# EAGLE board FAJAS (original) (EAGLE 9.6.2)
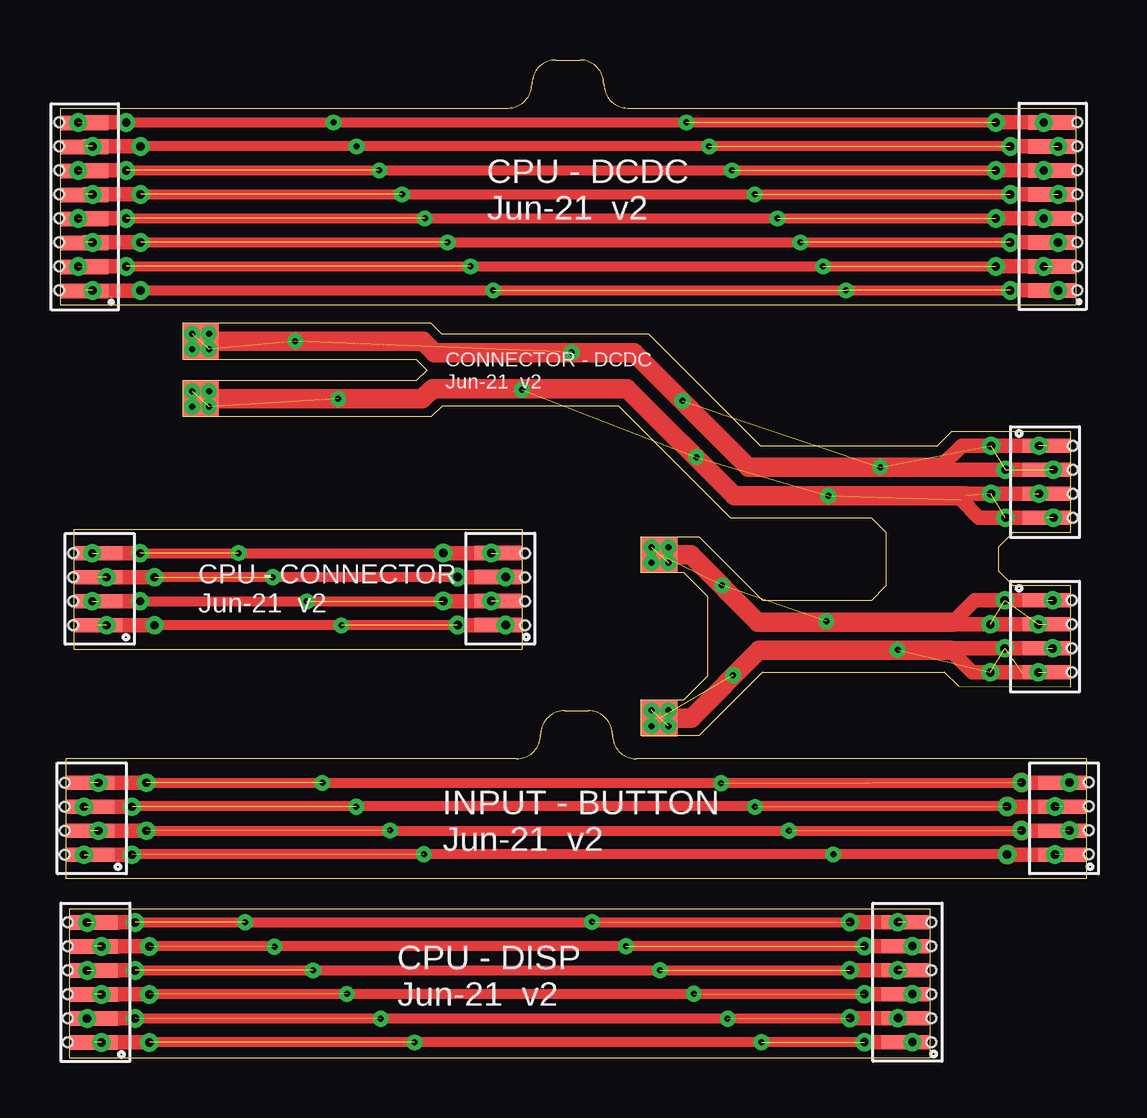
[diagram p0: board, top side]
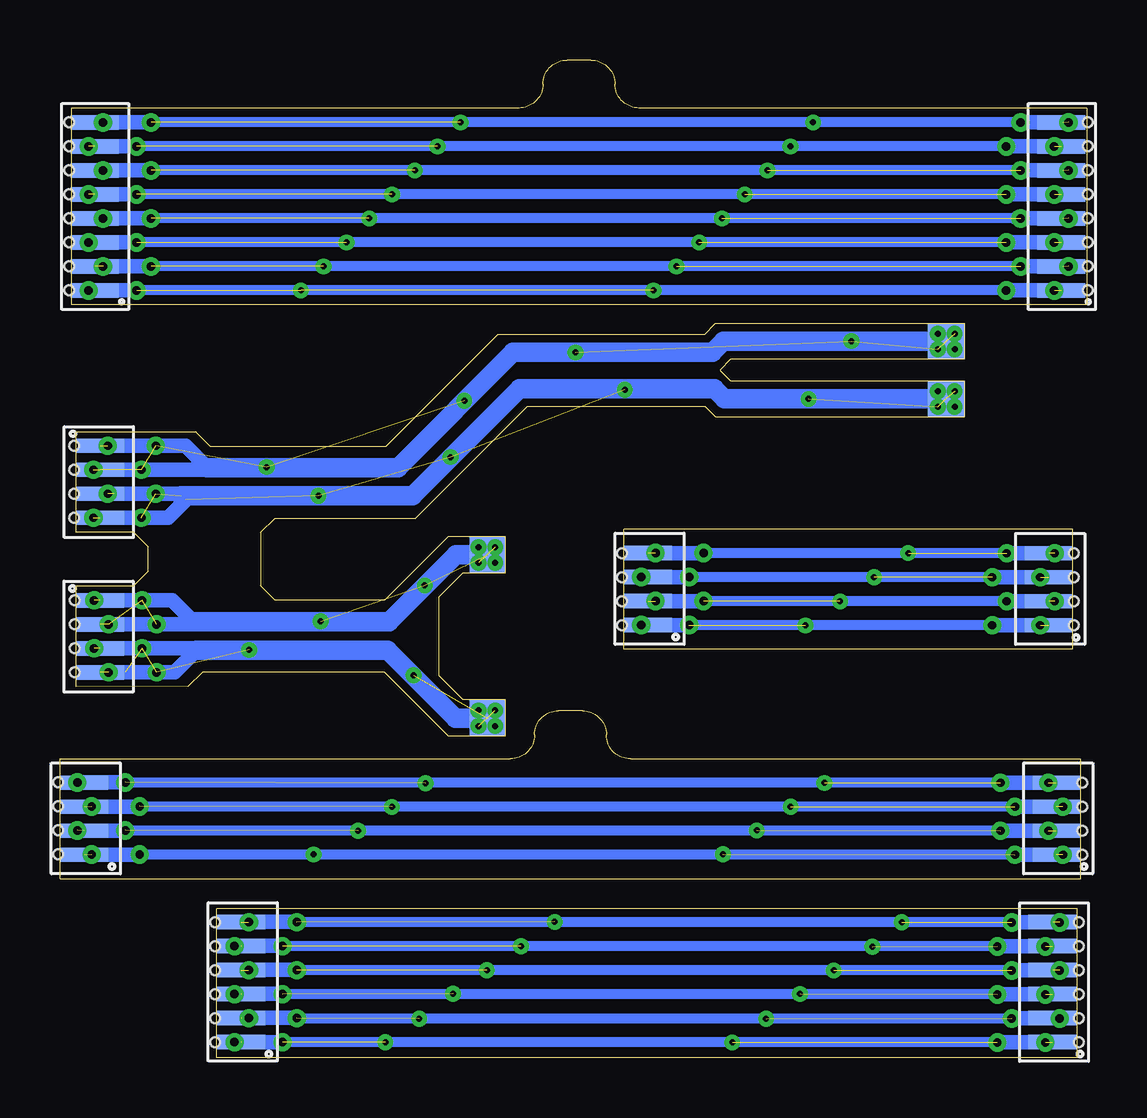
[diagram p1: board, bottom side, seen from below]

Size 42.81 x 41.57 mm. Coordinates in mm from the lower left corner, seen from the top.
Outline: 29.07,19.27 29.28,19.06
Outline: 29.28,19.06 33.83,19.06 34.43,19.66 34.43,21.89 33.83,22.49 27.97,22.49 23.31,27.15 15.92,27.15 15.47,26.7 5.12,26.7 5.12,28.2 14.85,28.2 15.3,28.65 14.85,29.1 5.12,29.1 5.12,30.6 15.47,30.6 15.92,30.15 24.55,30.15 29.07,25.63 29.21,25.49 36.55,25.49 37.15,26.09 42.13,26.09 42.13,21.89 39.73,21.89 39.13,21.29 39.13,20.26 39.73,19.66 42.13,19.66 42.13,15.46 37.46,15.47 36.86,16.07 29.28,16.06 29.07,15.85 26.63,13.41 24.22,13.41 24.22,14.91 26.01,14.91 27.01,15.91 27.01,19.21 26.01,20.21 24.22,20.21 24.22,21.71 26.63,21.71 29.07,19.27
Outline: 29.28,19.06 29.27,19.06 29.07,19.27
Outline: 42.81,7.45 42.81,12.45 24.03,12.45 arc-90 23.03,13.45 arc90 22.03,14.45 21.03,14.45 arc90 20.03,13.45 arc-90 19.03,12.45 0.25,12.45 0.25,7.45 42.81,7.45
Outline: 0.59,17.01 0.59,22.01 19.29,22.01 19.29,17.01 0.59,17.01
Outline: 0,31.37 42.34,31.37 42.34,39.57 23.67,39.57 arc-90 22.67,40.57 arc90 21.67,41.57 20.67,41.57 arc90 19.67,40.57 arc-90 18.67,39.57 0,39.57 0,31.37
Outline: 0.41,6.2 36.27,6.2 36.27,0 0.41,0 0.41,6.2
Copper layers (1*16): Top 0.035mm / dielectric 1.5mm / Bottom 0.035mm
Design rules "default *": minimum track width 6mil, minimum drill 0.35mm, track to track 6mil, track to pad 6mil, pad to pad 6mil, via to via 6mil, smd to smd 6mil, copper to edge 0mil, drill to drill 6mil, minimum pad ring 10mil, minimum via ring 8mil, stop-mask expansion 4mil, vias tented up to drill 50mil, thermal gap 10mil
Net classes: 1 power: width 0.178 mm; 2 gnd: width 0.305 mm, drill 0.483 mm, clearance 0.203 mm
Holes 0.4 mm at 0.54,21.02 0.54,20.02 0.54,19.02 0.54,18.02 -0.04,38.97 -0.04,37.97 -0.04,36.97 -0.04,35.97 -0.04,34.97 -0.04,33.97 -0.04,32.97 -0.04,31.97 42.41,35.97 42.41,36.97 42.41,37.97 42.41,38.97 42.41,31.97 42.41,32.97 42.41,33.97 42.41,34.97 42.18,19.06 42.18,18.06 42.18,17.06 42.18,16.06 42.21,22.5 42.21,23.5 42.21,24.5 42.21,25.5 42.88,11.47 42.88,10.47 42.88,9.47 42.88,8.47 0.2,8.46 0.2,9.46 0.2,10.46 0.2,11.46 0.33,5.64 0.33,4.64 0.33,3.64 0.33,2.64 0.33,1.64 0.33,0.64 36.33,0.65 36.33,1.65 36.33,2.65 36.33,3.65 36.33,4.65 36.33,5.65 19.38,18.03 19.38,19.03 19.38,20.03 19.38,21.03

## Footprints (pad centres in the part's own frame; a part is rotated, then mirrored left to right if it is on the bottom)
FLEX6 = smd 0.6 x 2: 1 -2.5,0.25; 2 -1.5,0.25; 3 -0.5,0.25; 4 0.5,0.25; 5 1.5,0.25; 6 2.5,0.25
FLEX4 = smd 0.6 x 2: 1 -3.77,1.52; 2 -2.77,1.52; 3 -1.77,1.52; 4 -0.77,1.52
TESTPAD_TP15SQ = smd 1.5 x 1.5: TP 0,0
FLEX8 = smd 0.6 x 2: 1 -3.5,0.25; 2 -2.5,0.25; 3 -1.5,0.25; 4 -0.5,0.25; 5 0.5,0.25; 6 1.5,0.25; 7 2.5,0.25; 8 3.5,0.25

## Placement (x,y rotation side)
DISP_CPU_1  DISP_CPU_1  [FLEX6]  35.51,3.15 90 top
DISP_CPU_2  DISP_CPU_2  [FLEX6]  1.67,3.14 90 top
DISP_CPU_3  DISP_CPU_2  [FLEX6]  1.18,3.15 90 bottom
DISP_CPU_4  DISP_CPU_1  [FLEX6]  35,3.16 90 bottom
FLX1  FLEX4  [FLEX4]  43.31,12.23 90 top
FLX2  FLEX4  [FLEX4]  42.64,21.73 270 bottom
FLX3  FLEX4  [FLEX4]  19.81,21.8 90 top
FLX4  FLEX4  [FLEX4]  39.61,21.73 270 top
FLX5  FLEX4  [FLEX4]  39.61,15.29 270 top
FLX6  FLEX4  [FLEX4]  2.79,12.23 90 top
FLX7  FLEX4  [FLEX4]  42.65,15.29 270 bottom
FLX8  FLEX4  [FLEX4]  40.27,12.23 90 bottom
FLX9  FLEX4  [FLEX4]  -0.26,12.23 90 bottom
FLX10  FLEX4  [FLEX4]  0.07,21.79 90 bottom
FLX11  FLEX4  [FLEX4]  16.77,21.8 90 bottom
GND1  TESTPAD_TPSQTP15SQ  [TESTPAD_TP15SQ]  24.98,20.96 0 bottom
GND2  TESTPAD_TPSQTP15SQ  [TESTPAD_TP15SQ]  24.98,20.95 0 top
K1  FLEX_DCDC  [FLEX8]  0.81,35.47 90 bottom
K2  FLEX_DCDC  [FLEX8]  1.26,35.45 90 top
K3  FLEX_CONN  [FLEX4]  3.11,21.79 90 top
K4  FLEX8  [FLEX8]  41.61,35.47 90 top
K5  FLEX8  [FLEX8]  41.11,35.47 90 bottom
VO+  TESTPAD_TPSQTP15SQ  [TESTPAD_TP15SQ]  5.87,29.84 0 top
VO+1  TESTPAD_TPSQTP15SQ  [TESTPAD_TP15SQ]  5.87,29.85 0 bottom
VO-  TESTPAD_TPSQTP15SQ  [TESTPAD_TP15SQ]  5.87,27.45 0 top
VO-1  TESTPAD_TPSQTP15SQ  [TESTPAD_TP15SQ]  5.87,27.45 0 bottom
VSYS_IP  TESTPAD_TPSQTP15SQ  [TESTPAD_TP15SQ]  24.98,14.15 0 top
VSYS_IP1  TESTPAD_TPSQTP15SQ  [TESTPAD_TP15SQ]  24.98,14.15 0 bottom

## Library data of the parts
DISP_CPU_1-DISP_CPU_4 K1 K2 K4 K5 = Flex_Faja_connector
FLX1-FLX11 K3 = Flex4
GND1 GND2 VO+ VO+1 VO- VO-1 VSYS_IP VSYS_IP1 = BeagleBone_Blue_R3

## Nets
BUTTON-INPUT_1: FLX1.1 FLX6.1 FLX8.1 FLX9.1
BUTTON-INPUT_2: FLX1.2 FLX6.2 FLX8.2 FLX9.2
BUTTON-INPUT_3: FLX1.3 FLX6.3 FLX8.3 FLX9.3
BUTTON-INPUT_4: FLX1.4 FLX6.4 FLX8.4 FLX9.4
CPU-CONN_1: FLX3.1 FLX10.1 FLX11.1 K3.1
CPU-CONN_2: FLX3.2 FLX10.2 FLX11.2 K3.2
CPU-CONN_3: FLX3.3 FLX10.3 FLX11.3 K3.3
CPU-CONN_4: FLX3.4 FLX10.4 FLX11.4 K3.4
CPU-DCDC_1: K1.1 K2.1 K4.1 K5.1
CPU-DCDC_2: K1.2 K2.2 K4.2 K5.2
CPU-DCDC_3: K1.3 K2.3 K4.3 K5.3
CPU-DCDC_4: K1.4 K2.4 K4.4 K5.4
CPU-DCDC_5: K1.5 K2.5 K4.5 K5.5
CPU-DCDC_6: K1.6 K2.6 K4.6 K5.6
CPU-DCDC_7: K1.7 K2.7 K4.7 K5.7
CPU-DCDC_8: K1.8 K2.8 K4.8 K5.8
DSP-CPU_1: DISP_CPU_1.1 DISP_CPU_2.1 DISP_CPU_3.1 DISP_CPU_4.1
DSP-CPU_2: DISP_CPU_1.2 DISP_CPU_2.2 DISP_CPU_3.2 DISP_CPU_4.2
DSP-CPU_3: DISP_CPU_1.3 DISP_CPU_2.3 DISP_CPU_3.3 DISP_CPU_4.3
DSP-CPU_4: DISP_CPU_1.4 DISP_CPU_2.4 DISP_CPU_3.4 DISP_CPU_4.4
DSP-CPU_5: DISP_CPU_1.5 DISP_CPU_2.5 DISP_CPU_3.5 DISP_CPU_4.5
DSP-CPU_6: DISP_CPU_1.6 DISP_CPU_2.6 DISP_CPU_3.6 DISP_CPU_4.6
GND: FLX5.1 FLX5.2 FLX7.1 FLX7.2 GND1.TP GND2.TP
VOUT+: FLX2.1 FLX2.2 FLX4.1 FLX4.2 VO+1.TP VO+.TP
VOUT-: FLX2.3 FLX2.4 FLX4.3 FLX4.4 VO-1.TP VO-.TP
VSYS: FLX5.3 FLX5.4 FLX7.3 FLX7.4 VSYS_IP1.TP VSYS_IP.TP

## Tracks (layer width: path | path; a pad name or v marks a point on that pad's centre or on a via)
BUTTON-INPUT_1  (via drill 0.25, 0.35)  (3 unrouted)
  Top 0.406: v39.48,8.47 v32.23,8.47 v3.01,8.47 v3,8.46
  Top 0.61: FLX8.1 39.49,8.46 | FLX9.1 v3,8.46
  Top 0.813: 39.49,8.46 v39.48,8.47
  Bottom 0.406: v39.48,8.47 v32.23,8.47 v3.01,8.47 v3,8.46
  Bottom 0.61: FLX9.1 v3,8.46 | FLX8.1 v39.49,8.46 v39.48,8.47
  other vias: 41.48,8.47 1,8.46 15.17,8.48
BUTTON-INPUT_2  (via drill 0.25, 0.35)  (4 unrouted)
  Top 0.406: v3.6,9.46 v40.09,9.46 40.09,9.46
  Top 0.61: FLX8.2 40.09,9.46 | FLX9.2 v3.6,9.46
  Top 0.813: 40.09,9.46 v40.08,9.47
  Bottom 0.406: v3.6,9.46 v40.09,9.46
  Bottom 0.61: FLX9.2 v3.6,9.46 | FLX8.2 v40.09,9.46 v40.08,9.47
  other vias: 30.38,9.46 42.08,9.47 1.6,9.46 13.76,9.47
BUTTON-INPUT_3  (via drill 0.25, 0.35)  (4 unrouted)
  Top 0.406: v39.48,10.47 v3.01,10.47 v3,10.46
  Top 0.61: FLX8.3 39.49,10.46 | FLX9.3 v3,10.46
  Top 0.813: 39.49,10.46 v39.48,10.47
  Bottom 0.406: v39.48,10.47 v3.01,10.47 v3,10.46
  Bottom 0.61: FLX9.3 v3,10.46 | FLX8.3 v39.49,10.46 v39.48,10.47
  other vias: 41.48,10.47 1,10.46 28.97,10.45 12.35,10.46
BUTTON-INPUT_4  (via drill 0.25, 0.35)  (4 unrouted)
  Top 0.406: v3.6,11.46 v40.09,11.46 40.09,11.46
  Top 0.61: FLX8.4 40.09,11.46 | FLX9.4 v3.6,11.46
  Top 0.813: 40.09,11.46 v40.08,11.47
  Bottom 0.406: v3.6,11.46 v40.07,11.46 v40.08,11.47
  Bottom 0.61: FLX9.4 v3.6,11.46 | v40.08,11.47 v42.08,11.47
  other vias: 1.6,11.46 10.94,11.45 27.56,11.44
CPU-CONN_1  (via drill 0.25, 0.35)  (3 unrouted)
  Top 0.406: v16.58,18.03 3.95,18.03 v3.94,18.02
  Top 0.508: FLX10.1
  Top 0.61: FLX10.1 v3.94,18.02 | FLX11.1 v16.58,18.03
  Bottom 0.406: 3.98,18.02 FLX11.1
  Bottom 0.61: FLX10.1 3.98,18.02 | v16.58,18.03 v18.58,18.03
  other vias: 1.94,18.02 11.73,18.01
CPU-CONN_2  (via drill 0.25, 0.35)  (3 unrouted)
  Top 0.406: v3.34,19.02 15.97,19.02 v15.98,19.03
  Top 0.61: FLX10.2 v3.34,19.02 | FLX11.2 v15.98,19.03
  Bottom 0.406: 3.38,19.02 18.01,19.02 FLX11.2
  Bottom 0.61: FLX10.2 3.38,19.02 | v15.98,19.03 18,19.03 18.01,19.02
  other vias: 17.98,19.03 1.34,19.02 10.29,19.01
CPU-CONN_3  (via drill 0.25, 0.35)  (3 unrouted)
  Top 0.406: v16.58,20.03 3.95,20.03 v3.94,20.02
  Top 0.508: FLX10.3
  Top 0.61: FLX10.3 v3.94,20.02 | FLX11.3 v16.58,20.03
  Bottom 0.406: 4.06,20.02 FLX11.3
  Bottom 0.61: FLX10.3 4.06,20.02 | v16.58,20.03 v18.58,20.03
  other vias: 1.94,20.02 8.87,20.02
CPU-CONN_4  (via drill 0.25, 0.35)  (4 unrouted)
  Top 0.406: v3.34,21.02 15.97,21.02 v15.98,21.03
  Top 0.61: FLX10.4 v3.34,21.02 | v15.98,21.03 v17.98,21.03
  Bottom 0.406: v3.34,21.02 17.95,21.02 18.92,21.02 18.98,21.08
  Bottom 0.61: FLX10.4 v3.34,21.02 | v15.98,21.03 17.94,21.03 17.95,21.02
  other vias: 1.34,21.02 7.45,21.03
CPU-DCDC_1  (via drill 0.25, 0.35)  (3 unrouted)
  Top 0.406: 1.01,31.97 K2.1 | v3.36,31.97 v39.61,31.97
  Top 0.61: K2.1 3.36,31.95 v3.36,31.97 | v39.61,31.97 K5.1
  Bottom 0.406: K1.1 1.51,31.97 v39.61,31.97 v41.61,31.97
  Bottom 0.61: v3.36,31.97 1.51,31.97 | K5.1 v39.61,31.97
  other vias: 1.36,31.97 18.06,31.97 32.76,31.97
CPU-DCDC_2  (via drill 0.25, 0.35)  (5 unrouted)
  Top 0.406: 41.36,32.95 K5.2 | v2.76,32.97 39.46,32.97
  Top 0.61: K2.2 1.01,32.97 v2.76,32.97 | v39.01,32.97 39.46,32.97 v41.01,32.97
  Bottom 0.406: 2.81,32.97 v39.01,32.97
  Bottom 0.61: K1.2 2.81,32.97 | v39.01,32.97 v41.01,32.97
  other vias: 0.76,32.97 17.11,32.97 31.81,32.97
CPU-DCDC_3  (via drill 0.25, 0.35)  (3 unrouted)
  Top 0.406: 1.01,33.97 K2.3 | v3.36,33.97 v39.61,33.97
  Top 0.61: K2.3 1.01,33.97 v3.36,33.97 | v39.61,33.97 K5.3
  Bottom 0.406: K1.3 v39.61,33.97 v41.61,33.97
  Bottom 0.61: v3.36,33.97 K1.3 | K5.3 v39.61,33.97
  other vias: 1.36,33.97 16.16,33.97 30.86,33.97
CPU-DCDC_4  (via drill 0.25, 0.35)  (4 unrouted)
  Top 0.406: 41.36,34.95 K5.4 | v2.76,34.97 v39.01,34.97
  Top 0.61: K2.4 1.01,34.97 v2.76,34.97 | v39.01,34.97 v41.01,34.97
  Bottom 0.406: 2.91,34.97 v39.01,34.97 | 41.06,34.97 K5.4
  Bottom 0.61: K1.4 2.91,34.97 | v39.01,34.97 41.06,34.97
  other vias: 0.76,34.97 15.21,34.97 29.91,34.97
CPU-DCDC_5  (via drill 0.25, 0.35)  (4 unrouted)
  Top 0.406: 1.01,35.97 K2.5 | v3.36,35.97 v39.61,35.97
  Top 0.61: K2.5 1.01,35.97 v3.36,35.97 | v39.61,35.97 K5.5
  Bottom 0.406: K1.5 1.41,35.97 v39.61,35.97
  Bottom 0.61: v3.36,35.97 1.41,35.97 | K5.5 v39.61,35.97
  other vias: 1.36,35.97 41.61,35.97 14.26,35.97 28.96,35.97
CPU-DCDC_6  (via drill 0.25, 0.35)  (4 unrouted)
  Top 0.406: v2.76,36.97 39.36,36.97
  Top 0.61: K2.6 1.01,36.97 v2.76,36.97 | v39.01,36.97 39.36,36.97 v41.01,36.97
  Bottom 0.406: 2.81,36.97 v39.01,36.97 | 41.06,36.97 K5.6
  Bottom 0.61: K1.6 2.81,36.97 | v39.01,36.97 41.06,36.97
  other vias: 0.76,36.97 13.31,36.97 28.01,36.97
CPU-DCDC_7  (via drill 0.25, 0.35)  (3 unrouted)
  Top 0.406: 1.01,37.97 K2.7 | v3.36,37.97 v12.36,37.97 v39.61,37.97
  Top 0.61: K2.7 1.01,37.97 v3.36,37.97 | v39.61,37.97 K5.7
  Bottom 0.406: 3.46,37.97 v39.61,37.97
  Bottom 0.61: K1.7 3.46,37.97 | K5.7 v39.61,37.97
  other vias: 1.36,37.97 41.61,37.97 27.06,37.97
CPU-DCDC_8  (via drill 0.25, 0.35)  (3 unrouted)
  Top 0.406: 41.36,38.95 K5.8 | v2.76,38.97 v11.41,38.97 v39.01,38.97
  Top 0.61: K2.8 1.01,38.97 v2.76,38.97 | v39.01,38.97 v41.01,38.97
  Bottom 0.406: 2.81,38.97 v39.01,38.97 | 41.11,38.97 K5.8
  Bottom 0.61: K1.8 2.81,38.97 | v39.01,38.97 41.11,38.97
  other vias: 0.76,38.97 26.11,38.97
DSP-CPU_1  (via drill 0.25, 0.35)  (4 unrouted)
  Top 0.406: v33.53,0.65 3.75,0.65 v3.73,0.64
  Top 0.61: DISP_CPU_2.1 v3.73,0.64 | v33.53,0.65 v35.53,0.65
  Bottom 0.406: v3.73,0.64 33.52,0.64 v33.53,0.65
  Bottom 0.61: DISP_CPU_3.1 3.72,0.65 v3.73,0.64 | DISP_CPU_4.1 v33.53,0.65
  other vias: 1.73,0.64 14.78,0.64 29.24,0.65
DSP-CPU_2  (via drill 0.25, 0.35)  (3 unrouted)
  Top 0.406: v3.13,1.64 32.92,1.64 v32.93,1.65
  Top 0.61: DISP_CPU_2.2 v3.13,1.64 | v32.93,1.65 v34.93,1.65
  Bottom 0.406: v32.93,1.65 32.92,1.64 v1.13,1.64
  Bottom 0.61: DISP_CPU_3.2 3.12,1.65 v3.13,1.64 | DISP_CPU_4.2 v32.94,1.66 v32.93,1.65
  other vias: 27.83,1.63 13.37,1.62
DSP-CPU_3  (via drill 0.25, 0.35)  (4 unrouted)
  Top 0.406: v33.53,2.65 3.75,2.65 v3.73,2.64
  Top 0.61: DISP_CPU_2.3 v3.73,2.64 | v33.53,2.65 v35.53,2.65
  Bottom 0.406: v3.73,2.64 33.52,2.64 v33.54,2.66
  Bottom 0.61: DISP_CPU_3.3 3.72,2.65 v3.73,2.64 | DISP_CPU_4.3 v33.54,2.66 v33.53,2.65
  other vias: 1.73,2.64 11.96,2.66 26.42,2.67
DSP-CPU_4  (via drill 0.25, 0.35)  (4 unrouted)
  Top 0.406: v3.13,3.64 32.92,3.64 v32.93,3.65
  Top 0.61: DISP_CPU_2.4 v3.13,3.64 | v32.93,3.65 DISP_CPU_1.4
  Bottom 0.406: DISP_CPU_4.4 3.13,3.66 3.12,3.65
  Bottom 0.61: DISP_CPU_3.4 3.12,3.65 v3.13,3.64 | DISP_CPU_4.4 v32.94,3.66 v32.93,3.65
  other vias: 1.13,3.64 34.93,3.65 25.01,3.65 10.55,3.64
DSP-CPU_5  (via drill 0.25, 0.35)  (4 unrouted)
  Top 0.406: v33.53,4.65 3.44,4.65 3.42,4.64
  Top 0.61: DISP_CPU_2.5 3.42,4.64 v3.73,4.64 | v33.53,4.65 v35.53,4.65
  Bottom 0.406: v3.73,4.64 33.52,4.64 v33.54,4.66
  Bottom 0.61: DISP_CPU_3.5 3.72,4.65 v3.73,4.64 | DISP_CPU_4.5 v33.54,4.66 v33.53,4.65
  other vias: 1.73,4.64 8.94,4.63 23.59,4.65
DSP-CPU_6  (via drill 0.25, 0.35)  (4 unrouted)
  Top 0.406: v3.13,5.64 32.92,5.64 v32.93,5.65
  Top 0.61: DISP_CPU_2.6 v3.13,5.64 | v32.93,5.65 DISP_CPU_1.6
  Bottom 0.406: DISP_CPU_3.6 v32.93,5.65 v32.94,5.66
  Bottom 0.61: DISP_CPU_3.6 3.12,5.65 v3.13,5.64 | DISP_CPU_4.6 v32.94,5.66 v32.93,5.65
  other vias: 1.13,5.64 34.93,5.65 7.72,5.65 22.18,5.66
GND  (via drill 0.25, 0.35)  (7 unrouted)
  Top 0.61: FLX7.1 38.13,19.06 37.22,18.15 37.17,18.1 37.21,18.06 FLX7.2
  Top 0.813: GND1.TP 26.3,20.95 29.1,18.15 37.22,18.15
  Bottom 0.61: FLX7.1 38.12,19.06 37.23,18.17 37.34,18.06 FLX7.2
  Bottom 0.813: GND1.TP 26.3,20.96 29.09,18.17 37.23,18.17
  other vias: 41.38,19.06 39.38,19.06 40.78,18.06 38.78,18.06 27.6,19.68 31.94,18.19
VOUT+  (via drill 0.25, 0.35)  (11 unrouted)
  Top 0.61: FLX2.1 37.59,25.5 36.69,24.6 36.58,24.49 FLX2.2
  Top 0.813: VO+1.TP 15.15,29.84 15.61,29.38 23.92,29.38 28.7,24.6 36.69,24.6
  Bottom 0.61: FLX2.1 37.57,25.5 36.66,24.59 36.75,24.5 FLX2.2
  Bottom 0.813: VO+1.TP 15.14,29.85 15.6,29.39 23.91,29.39 28.71,24.59 36.66,24.59
  other vias: 5.51,30.17 6.21,29.52 40.81,25.5 38.81,25.5 41.41,24.5 39.41,24.5 9.81,29.86 21.32,29.39 25.95,27.37 34.19,24.61
VOUT+1  (via drill 0.25)
  other vias: 6.21,30.17
VOUT+2  (via drill 0.25)
  other vias: 5.51,29.52
VOUT+3  (via drill 0.25)  (1 unrouted)
  other vias: 24.66,21.27 25.36,20.62
VOUT+4  (via drill 0.25)
  other vias: 6.21,27.77
VOUT+5  (via drill 0.25)
  other vias: 5.51,27.12
VOUT+6  (via drill 0.25)
  other vias: 25.36,21.27
VOUT+7  (via drill 0.25)
  other vias: 24.66,20.62
VOUT+8  (via drill 0.25)  (1 unrouted)
  other vias: 24.66,14.47 25.36,13.82
VOUT+9  (via drill 0.25)
  other vias: 25.36,14.47
VOUT+10  (via drill 0.25)
  other vias: 24.66,13.82
VOUT-  (via drill 0.25, 0.35)  (11 unrouted)
  Top 0.508: FLX2.3 40.55,23.5 | 37.57,23.24 37.56,23.25
  Top 0.61: FLX2.3 37.83,23.5 37.74,23.41 37.57,23.24 38.31,22.5 FLX2.4
  Top 0.813: VO-1.TP 15.09,27.45 15.52,27.88 23.64,27.88 28.11,23.41 37.74,23.41
  Bottom 0.61: FLX2.3 37.3,23.5 | 37.3,23.5 36.68,23.5 36.59,23.41 | FLX2.4 38.3,22.5 37.3,23.5
  Bottom 0.813: VO-1.TP 15.1,27.45 15.53,27.88 23.64,27.88 28.11,23.41 36.59,23.41 37.75,23.41
  other vias: 5.51,27.77 6.21,27.12 40.81,23.5 38.81,23.5 41.41,22.5 39.41,22.5 32.03,23.42 26.52,25.03 19.26,27.83 11.6,27.45
VSYS  (via drill 0.25, 0.35)  (7 unrouted)
  Top 0.61: 40.09,16.06 FLX7.4 38.03,16.06 37.12,16.97 37.05,17.04 37.07,17.06 FLX7.3
  Top 0.813: VSYS_IP1.TP 26.32,14.15 29.14,16.97 37.12,16.97
  Bottom 0.61: FLX7.3 36.54,17.06 36.46,16.98 | FLX7.4 38.03,16.06 37.11,16.98
  Bottom 0.813: VSYS_IP1.TP 26.32,14.15 29.15,16.98 36.46,16.98 37.11,16.98
  other vias: 41.38,17.06 39.38,17.06 40.78,16.06 38.78,16.06 28.06,15.94 34.92,16.99

## Text on the board
tNames: CPU - DCDC / Jun-21 v2 | CONNECTOR - DCDC / Jun-21 v2 | CPU - CONNECTOR / Jun-21 v2 | INPUT - BUTTON / Jun-21 v2 | CPU - DISP / Jun-21 v2